# EAGLE board deskaRGB (EAGLE 9.1.3)
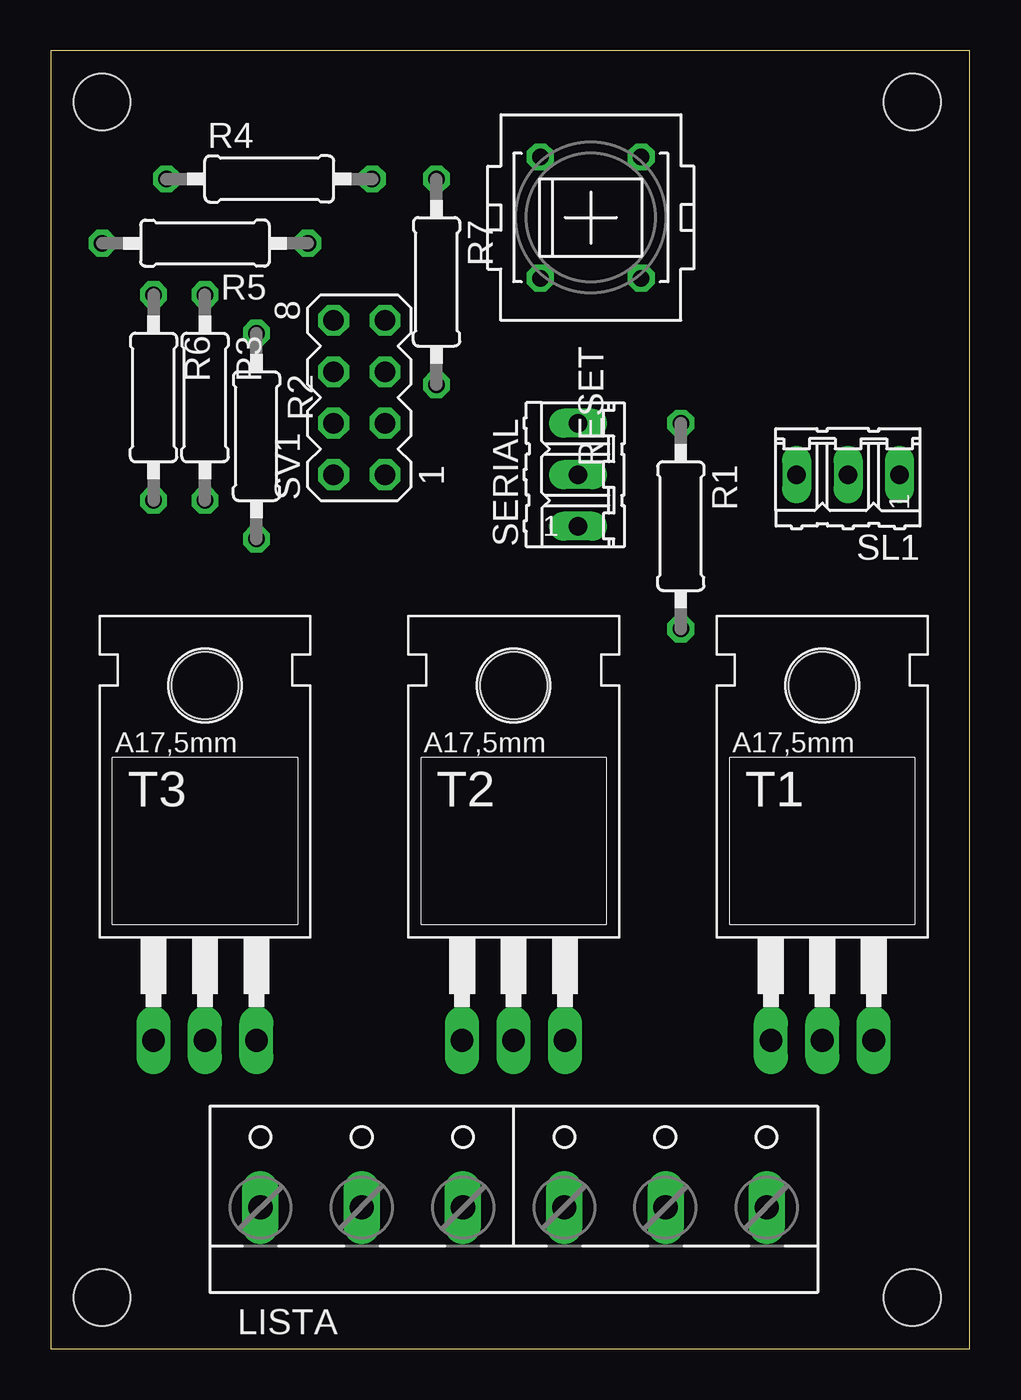
[diagram p0: board, top side]
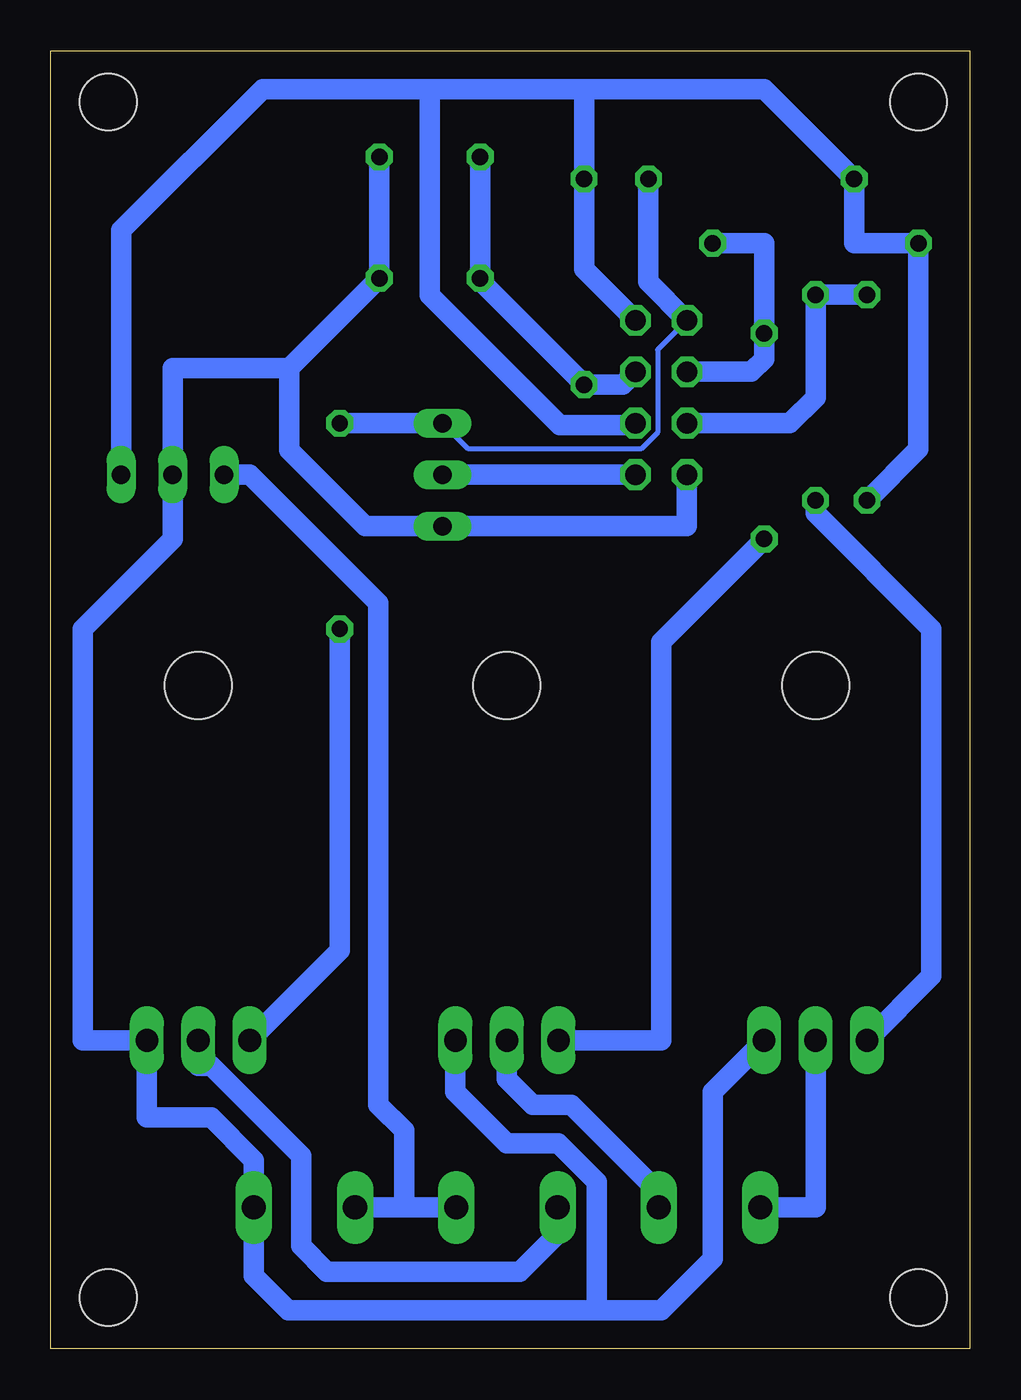
[diagram p1: board, bottom side, seen from below]

Size 45.39 x 64.12 mm. Coordinates in mm from the lower left corner, seen from the top.
Outline: 0,0 45.39,0 45.39,64.12 0,64.12 0,0
Copper layers (1*16): Top 0.035mm / dielectric 1.5mm / Bottom 0.035mm
Design rules "default": minimum track width 10mil, minimum drill 24mil, track to track 8mil, track to pad 8mil, pad to pad 8mil, via to via 8mil, smd to smd 8mil, copper to edge 40mil, drill to drill 8mil, minimum pad ring 10mil, minimum via ring 8mil, stop-mask expansion 4mil, vias tented up to drill 0mil, thermal gap 10mil
Holes 2.79 mm at 2.54,61.59 42.55,61.59 2.54,2.54 42.55,2.54

## Footprints (pad centres in the part's own frame; a part is rotated, then mirrored left to right if it is on the bottom)
W237-6 = drill 1.194 long: 1 -12.5,-1.27; 2 -7.5,-1.27; 3 -2.5,-1.27; 4 2.5,-1.27; 5 7.5,-1.27; 6 12.5,-1.27
0207/10 = drill 0.813 octagon: 1 -5.08,0; 2 5.08,0
PVA1R = drill 0.813 octagon: 1 -2.997,2.489; 2 -2.997,-2.489; 3 2.997,2.489; 4 2.997,-2.489
03P = drill 0.914 long: 1 -2.54,0; 2 0,0; 3 2.54,0
MA04-2 = drill 1.016 octagon: 1 -3.81,-1.27; 2 -3.81,1.27; 3 -1.27,-1.27; 4 -1.27,1.27; 5 1.27,-1.27; 6 1.27,1.27; 7 3.81,-1.27; 8 3.81,1.27
TO220 = drill 1.118 long: 1 -2.54,-6.35; 2 0,-6.35; 3 2.54,-6.35 | hole 3.302: 0,11.176

## Placement (x,y rotation side)
LISTA  [W237-6]  22.86,8.26 0 top
R1  1k  [0207/10]  31.11,40.64 270 top
R2  1k  [0207/10]  10.16,45.09 270 top
R3  1k  [0207/10]  7.62,46.99 270 top
R4  1k  [0207/10]  10.79,57.78 0 top
R5  1k  [0207/10]  7.62,54.61 180 top
R6  1k  [0207/10]  5.08,46.99 270 top
R7  10k  [0207/10]  19.05,52.7 270 top
RESET  PVA1R  [PVA1R]  26.67,55.88 270 top
SERIAL  [03P]  26.04,43.18 90 top
SL1  DCDC  [03P]  39.37,43.18 180 top
SV1  ESP8266  [MA04-2]  15.24,46.99 90 top
T1  TIP122  [TO220]  38.1,21.59 0 top
T2  TIP122  [TO220]  22.86,21.59 0 top
T3  TIP122  [TO220]  7.62,21.59 0 top

## Library data of the parts
LISTA = con-wago-500; OC_FARNELL: unknown; OC_NEWARK: unknown
R1-R7 = rcl
RESET = switch-misc
SERIAL SL1 = con-amp-quick; OC_FARNELL: unknown; OC_NEWARK: unknown
SV1 = con-lstb; OC_FARNELL: unknown; OC_NEWARK: unknown
T1-T3 = transistor

## Nets
+3V3: R4.1 R5.2 R6.2 R7.1 SL1.1 SV1.3 SV1.7
+12V: LISTA.4 LISTA.5 SL1.3
GND: LISTA.6 RESET.1 RESET.3 SERIAL.1 SL1.2 SV1.2 T1.3 T2.3 T3.3
GPIO0: R2.1 R5.1 SV1.6
GPIO2: R3.1 R6.1 SV1.4
N$1: LISTA.3 T1.2
N$2: LISTA.2 T2.2
N$3: LISTA.1 T3.2
N$4: R1.2 T1.1
N$5: R2.2 T2.1
N$6: R3.2 T3.1
RST: R7.2 RESET.2 RESET.4 SV1.5
RX: R1.1 R4.2 SERIAL.3 SV1.8
TX: SERIAL.2 SV1.1

## Tracks (layer width: path | path; a pad name or v marks a point on that pad's centre or on a via)
+3V3
  Bottom 1.016: 26.67,62.23 19.05,62.23 | 19.05,62.23 R7.1 19.05,53.34 SV1.7 | 26.67,62.23 26.67,52.03 20.25,45.62 16.61,45.62 SV1.3 | R6.2 2.54,44.45 R5.2 5.71,54.61 R4.1 10.16,62.23 16.51,62.23 19.05,62.23 | SL1.1 41.91,55.24 34.92,62.23 26.67,62.23
+12V
  Bottom 1.016: LISTA.4 27.94,6.99 | 27.94,6.99 LISTA.5 | 27.94,6.99 27.94,10.79 29.21,12.06 29.21,36.83 30.48,38.1 35.56,43.18 SL1.3
GND
  Bottom 1.016: RESET.1 RESET.3 33.6,48.44 | 33.6,48.44 39.37,48.44 SL1.2 39.37,40.01 43.81,35.56 43.81,15.24 T1.3 40.64,11.43 37.47,11.43 35.36,9.32 LISTA.6 35.36,3.61 33.66,1.91 18.41,1.91 | SV1.2 13.97,40.64 SERIAL.1 29.84,40.64 33.6,44.4 33.6,48.44 | 18.41,1.91 15.24,1.91 12.7,4.45 12.7,12.7 T3.3 | 18.41,1.91 18.41,8.26 20.32,10.16 22.86,10.16 25.4,12.7 T2.3
GPIO0
  Bottom 1.016: R5.1 10.16,54.61 R2.1 10.16,48.9 10.79,48.26 SV1.6
GPIO2
  Bottom 1.016: R6.1 R3.1 7.62,46.99 8.89,45.72 SV1.4
N$1
  Bottom 1.016: LISTA.3 20.36,5.67 22.23,3.81 31.75,3.81 33.02,5.08 33.02,9.53 37.47,13.97 38.1,13.97 T1.2
N$2
  Bottom 1.016: LISTA.2 15.36,7.74 19.68,12.06 21.59,12.06 22.86,13.34 T2.2
N$3
  Bottom 1.016: T3.2 7.62,6.99 LISTA.1
N$4
  Bottom 1.016: R1.2 31.11,19.68 T1.1
N$5
  Bottom 1.016: T2.1 15.24,15.24 15.24,34.92 R2.2
N$6
  Bottom 1.016: T3.1 1.91,18.41 1.91,35.56 7.62,41.27 R3.2
RST
  Bottom 1.016: SV1.5 17.14,47.62 R7.2 24.18,52.76 RESET.4 RESET.2
RX
  Bottom 0.254: SV1.8 15.42,49.35 15.42,45.27 16.23,44.45 24.77,44.45 SERIAL.3
  Bottom 1.016: R1.1 SERIAL.3 | R4.2 15.88,52.7 SV1.8
TX
  Bottom 1.016: SV1.1 23.5,43.18 SERIAL.2